# Altium PCB mach sac.PcbDoc
Units mm, origin at the board's own origin, x right, y up, seen from the top; angles counter-clockwise.
Board outline 69.72 x 37.72 mm, 2 copper layers (Top Layer, Bottom Layer); 82 components, 47 nets, 227 pads, 74 vias.
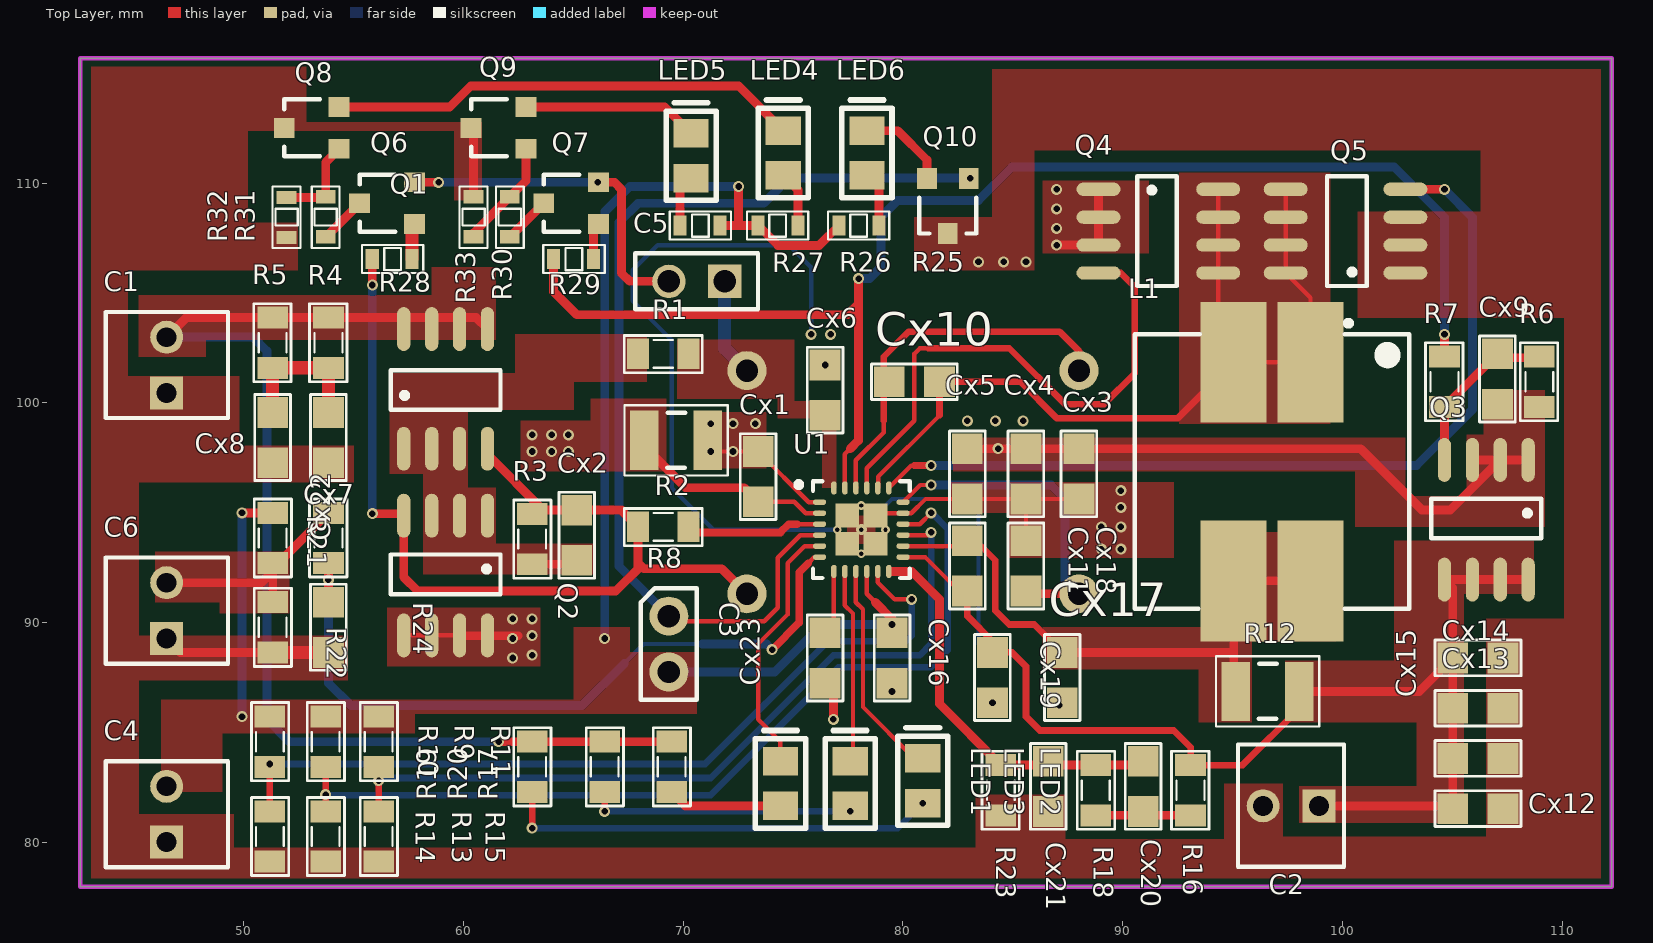
[diagram p0: Top Layer view]
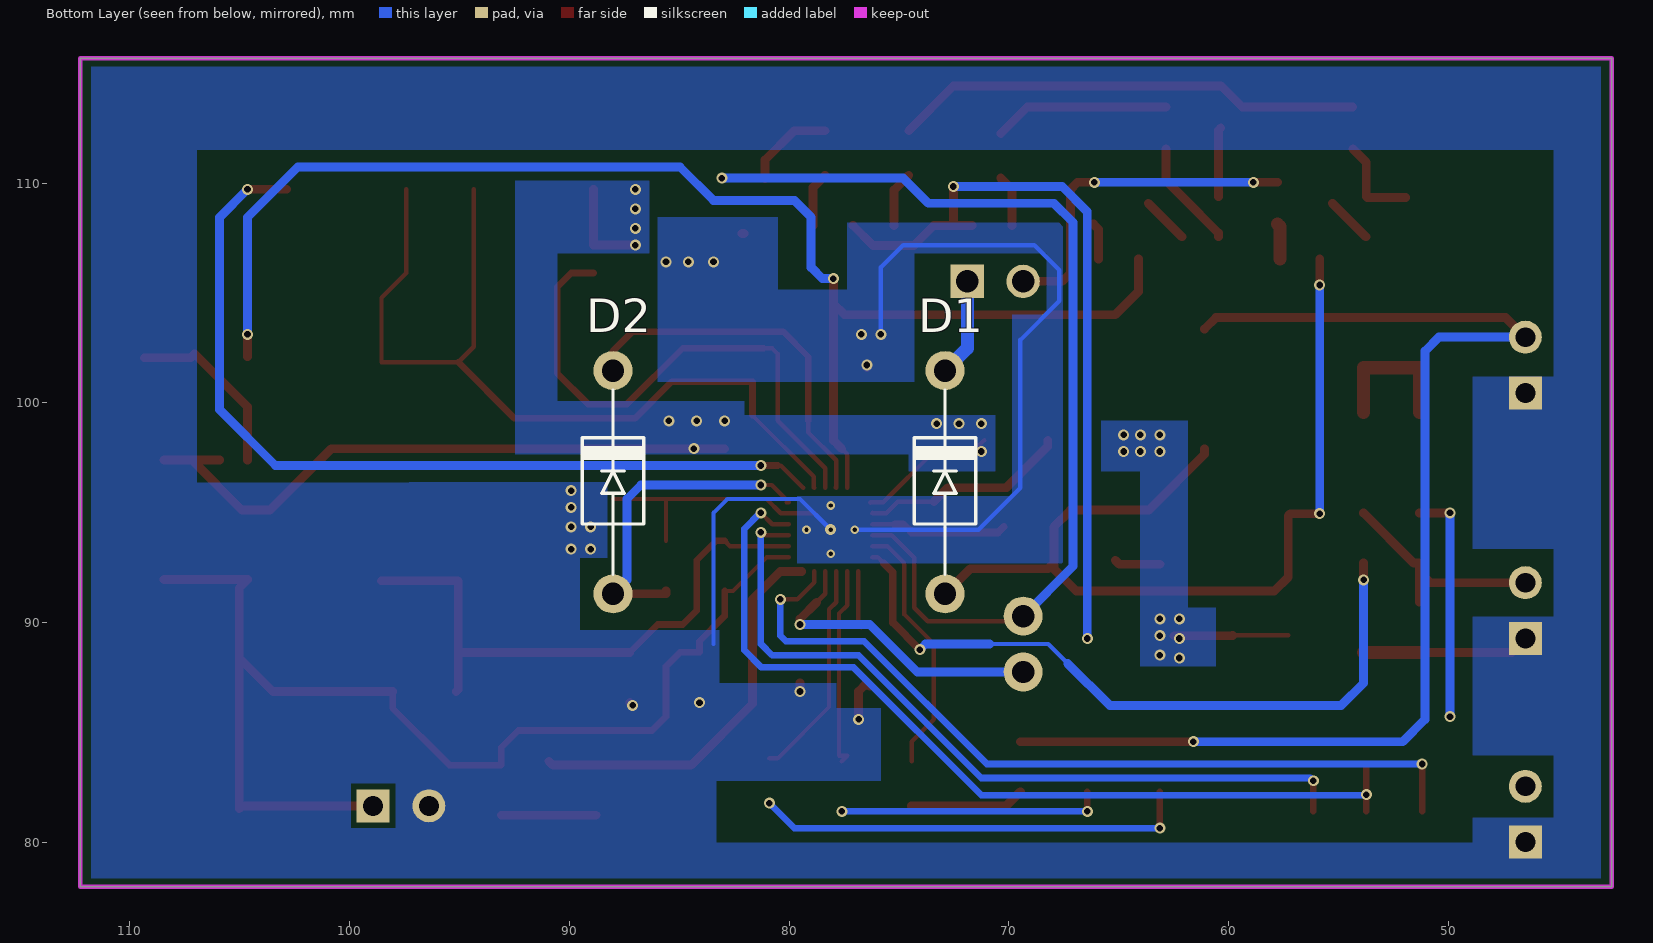
[diagram p1: Bottom Layer view, seen from below]
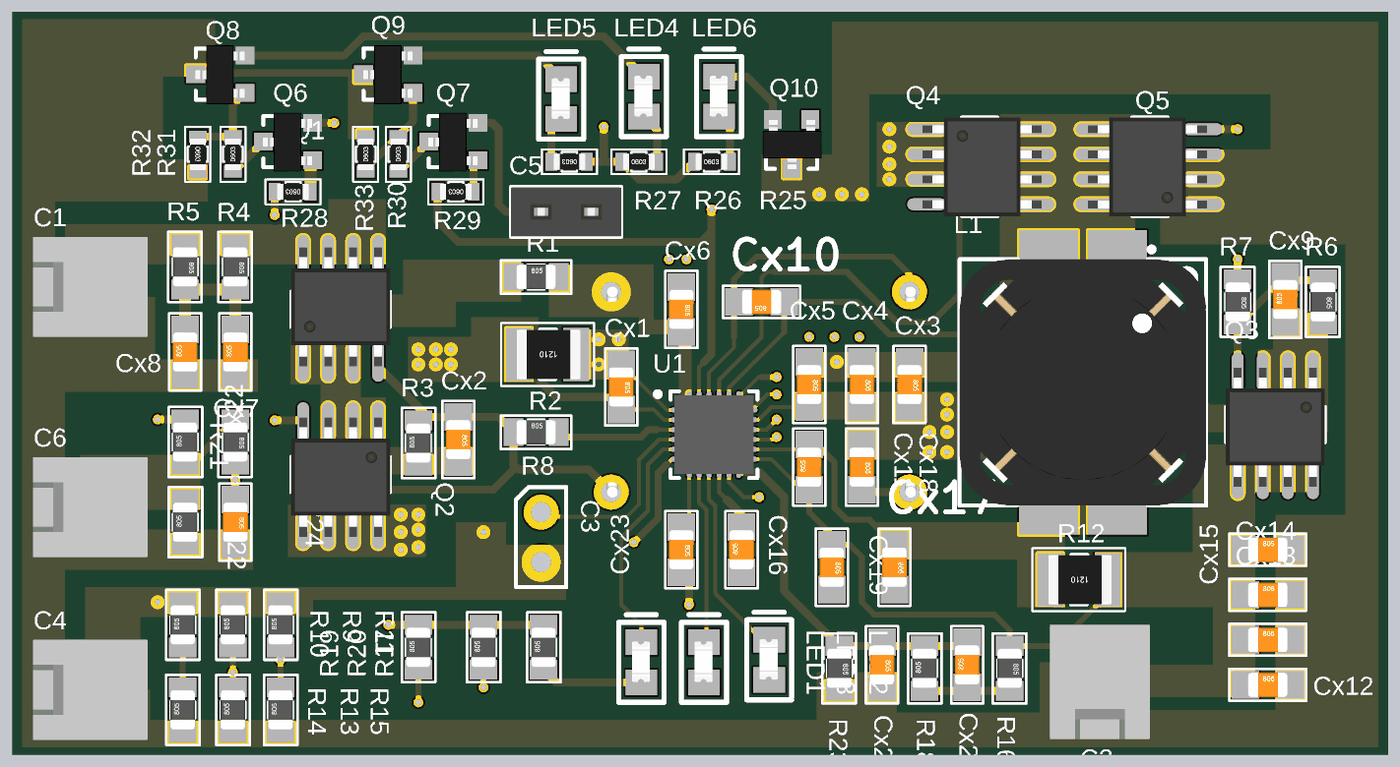
[diagram p2: 3D render of the assembled board from above, using the file's embedded part models]

## Layer stack, top to bottom
Top Solder: solder mask 0.0102, Solder Resist, Dk 3.5
Top Layer: signal copper 0.0356
Dielectric 1: dielectric 0.32, FR-4, Dk 4.8
Bottom Layer: signal copper 0.0356
Bottom Solder: solder mask 0.0102, Solder Resist, Dk 3.5

## Board outline
42.545,77.978 42.545,115.697 112.268,115.697 112.268,77.978

## Design rules (kind name [scope] priority, off if disabled: settings)
Clearance [All] p1: gap=0.254 ignorepadtopadclearanceinfootprint=FALSE except(0: Arc-Hole Track-Hole SMDPad-Hole THPad-Hole Via-Hole Fill-Hole Poly-Hole Region-Hole Text-Hole)
PlaneConnect [All] p1: planeconnectstyle=Direct reliefexpansion=0.508 reliefentries=4 reliefconductorwidth=0.254 reliefairgap=0.254
PolygonConnect [All] p1: connectstyle=Direct reliefconductorwidth=0.254 reliefentries=4 polygonreliefangle="90 Angle" airgapwidth=0.254
RoomDefinition "mach sac" [InComponentClass('mach sac')] p1: confinementstyle=ConfineIn formatcopy=TRUE lockcomponents=FALSE outline 0,0 50.8,0 50.8,25.4 0,25.4
RoutingVias [All] p1: holewidth=0.3 width=0.5 viastyle="Through Hole" minholewidth=0.3 minwidth=0.5 maxholewidth=0.3 maxwidth=0.5
SolderMaskExpansion [All] p1: expansion=0.102
Width [All] p1: maxlimit=0.6 minlimit=0.2 preferedwidth=0.4
29 further rules are at their usual default settings.

## Components (designator, comment, footprint, x,y, rotation, side; value= is the part's Value field where it differs from the comment)
C1 "Header2" HDR2 46.482,100.457 r90 top
C2 "Header2" HDR2 98.933,81.661 r180 top
C3 "JP2" JP2-CLOSED 69.342,90.297 r0 top
C4 "Header2" HDR2 46.482,80.01 r90 top
C5 "JP2" JP2-C1T 71.882,105.537 r180 top
C6 "Header2" HDR2 46.482,89.281 r90 top
Cx1 "0.1uF" C0805 73.406,96.774 r270 top value=33pF
Cx2 "2.2uF" C0805 65.151,94.107 r270 top value=33pF
Cx3 "10uF/50V" C0805 88.011,96.901 r270 top value=33pF
Cx4 "10uF/50V" C0805 85.598,96.901 r270 top value=33pF
Cx5 "10uF/50V" C0805 82.931,96.901 r270 top value=33pF
Cx6 "1uF" C0805 76.454,100.711 r270 top value=33pF
Cx7 "2.2uF" C0805 53.848,98.298 r90 top value=33pF
Cx8 "2.2uF" C0805 51.308,98.298 r90 top value=33pF
Cx9 "0.1uF" C0805 107.061,100.965 r90 top value=33pF
Cx10 "1uF" C0805 80.645,100.965 r180 top value=33pF
Cx11 "1uF" C0805 85.598,92.71 r270 top value=33pF
Cx12 "10uF" C0805 106.045,81.534 r0 top value=33pF
Cx13 "10uF" C0805 106.045,83.82 r0 top value=33pF
Cx14 "10uF" C0805 106.045,86.106 r0 top value=33pF
Cx15 "10uF" C0805 106.045,88.392 r0 top value=33pF
Cx16 "1uF" C0805 79.502,88.265 r90 top value=33pF
Cx17 "0.1uF" C0805 87.249,87.63 r270 top value=33pF
Cx18 "1uF" C0805 82.931,92.456 r90 top value=33pF
Cx19 "0.1uF" C0805 84.074,87.63 r270 top value=33pF
Cx20 "22p" C0805 90.932,82.423 r90 top value=33pF
Cx21 "22p" C0805 86.614,82.677 r270 top value=33pF
Cx22 "0.1uF" C0805 53.848,89.916 r270 top value=33pF
Cx23 "0.1uF" C0805 76.454,88.519 r270 top value=33pF
D1 "Diode" DIO-1A 72.898,91.313 r90 bottom value=1N5007
D2 "Diode" DIO-1A 88.011,91.313 r90 bottom value=1N5007
L1 "L-DIP-1" ? 96.802,96.879 r0 top value="150 mH"
LED1 "LED 3mm" "LED SMD" 74.422,81.661 r90 top value="LED 3 ly Single Colour"
LED2 "LED 3mm" "LED SMD" 80.899,81.788 r90 top value="LED 3 ly Single Colour"
LED3 "LED 3mm" "LED SMD" 77.597,81.661 r90 top value="LED 3 ly Single Colour"
LED4 "LED 3mm" "LED SMD" 74.549,110.363 r90 top value="LED 3 ly Single Colour"
LED5 "LED 3mm" "LED SMD" 70.358,110.236 r90 top value="LED 3 ly Single Colour"
LED6 "LED 3mm" "LED SMD" 78.359,110.363 r90 top value="LED 3 ly Single Colour"
Q1 "IRF9540" SO-8 59.182,100.584 r90 top
Q2 "IRF9540" SO-8 59.182,92.202 r270 top
Q3 "IRF9540" SO-8 106.553,94.742 r270 top value=IRF840
Q4 "IRF9540" SO-8 91.567,107.823 r0 top value=IRF840
Q5 "IRF9540" SO-8 100.203,107.823 r180 top value=IRF840
Q6 "TP0610K" SOT23-132 56.515,109.093 r90 top value=IRF840
Q7 "TP0610K" SOT23-132 64.897,109.093 r90 top value=IRF840
Q8 "2N7002DICT" SOT23-132 53.086,112.522 r90 top value=IRF840
Q9 "2N7002DICT" SOT23-132 61.594,112.522 r90 top value=IRF840
Q10 "2N7002DICT" SOT23-132 82.042,108.966 r180 top value=IRF840
R1 "10R" RES-SMD-0805 69.088,102.235 r0 top
R2 "0.01" RES-SMD-1210 69.723,98.298 r180 top
R3 "3.9" RES-SMD-0805 63.119,93.802 r90 top
R4 "3.9" RES-SMD-0805 53.848,102.743 r270 top
R5 "3.9" RES-SMD-0805 51.308,102.743 r270 top
R6 "10R" RES-SMD-0805 108.966,100.965 r270 top
R7 "10R" RES-SMD-0805 104.648,100.965 r270 top
R8 "1k" RES-SMD-0805 69.088,94.361 r0 top
R9 "1k" RES-SMD-0805 53.721,84.582 r90 top
R10 "100k" RES-SMD-0805 56.134,84.582 r90 top
R11 "1k" RES-SMD-0805 51.181,84.582 r90 top
R12 "0.01" RES-SMD-1210 96.647,86.868 r180 top
R13 "1k" RES-SMD-0805 53.721,80.264 r90 top
R14 "10k" RES-SMD-0805 56.134,80.264 r90 top
R15 "1k" RES-SMD-0805 51.181,80.264 r90 top
R16 "0R" RES-SMD-0805 93.091,82.372 r270 top
R17 "10k" RES-SMD-0805 69.469,83.439 r90 top
R18 "1000M" RES-SMD-0805 88.773,82.372 r90 top
R19 "10k" RES-SMD-0805 63.119,83.439 r90 top
R20 "10k" RES-SMD-0805 66.421,83.439 r90 top
R21 "100" RES-SMD-0805 51.308,93.853 r90 top
R22 "100" RES-SMD-0805 53.848,93.853 r270 top
R23 "10k" RES-SMD-0805 84.455,82.372 r270 top
R24 "100" RES-SMD-0805 51.308,89.789 r90 top
R25 "2.21k" RES-SMD-0603 77.978,108.077 r0 top
R26 "2.21k" RES-SMD-0603 74.295,108.077 r0 top
R27 "2.21k" RES-SMD-0603 70.777,108.077 r180 top
R28 "10k" RES-SMD-0603 56.769,106.553 r180 top
R29 "10k" RES-SMD-0603 65.024,106.553 r180 top
R30 "100k" RES-SMD-0603 62.103,108.458 r90 top
R31 "100k" RES-SMD-0603 53.721,108.458 r90 top
R32 "100k" RES-SMD-0603 51.943,108.458 r270 top
R33 "100k" RES-SMD-0603 60.452,108.458 r90 top
U1 "bq24610" QFN50P400X400X100_HS-25N 78.105,94.234 r0 top value=DIP24

## Footprints (in the part's own frame and the unit in brackets; to place one, negate y for a bottom-side part, rotate by r counter-clockwise, add the part's x,y. Pads: shape width x height; smd on the part's side, far side on the other; paste and mask are expansions set on the pad)
C0805 [mil] "Chip Resistor; Body 2.0 x 1.3 mm (LxW typ)"
  rect 55x55 smd: 1(-40,0) 2(50,0)
  silkscreen extent -72,-32 82,32, body extent -34,-25 44,25, height 31
DIO-1A [mil]
  round 70 hole 40: 1(0,0) 2(400,0)
  silkscreen extent 35,-55 365,55, body extent -11,-50 411,54, height 102
HDR2 [mm] "Connector; Header; 2 Position"
  rect 1.5x1.5 hole 0.9: 1(0,0)
  round 1.5 hole 0.9: 2(2.54,0)
  silkscreen extent -1.14,-2.79 3.68,2.77, body extent -1.27,-2.92 3.81,2.88, height 11.72
JP2-C1T [mm] "2 row, straight, gold plating"
  rect 1.52x1.52 hole 1.02: 1(0,0)
  round 1.52 hole 1.02: 2(2.54,0)
  silkscreen extent -1.52,-1.27 4.06,1.27, body extent -1.52,-1.25 4.06,1.25, height 8.51
JP2-CLOSED [mil]
  round 70 hole 40: 1(0,0) 2(0,-100)
  silkscreen extent -50,-150 50,50, body extent -50,-152 50,50, height 300
"LED SMD" [mm]
  rect 1.3x1.6 smd: 1(0,0) 2(2.032,0)
  silkscreen extent -1.02,-1.14 3.43,1.14, body extent 0.01,-0.43 2.07,0.47, height 0.85
QFN50P400X400X100_HS-25N [mm] "QFN, 24-Leads, Body 4.00x4.00mm, Pitch 0.50mm, Thermal Pad 2.90x2.90mm, IPC Medium Density"
  oval 0.6x0.25 smd: 1(-1.9,1.25) 2(-1.9,0.75) 3(-1.9,0.25) 4(-1.9,-0.25) 5(-1.9,-0.75) 6(-1.9,-1.25) 13(1.9,-1.25) 14(1.9,-0.75) 15(1.9,-0.25) 16(1.9,0.25) 17(1.9,0.75) 18(1.9,1.25)
  oval 0.25x0.6 smd: 7(-1.25,-1.9) 8(-0.75,-1.9) 9(-0.25,-1.9) 10(0.25,-1.9) 11(0.75,-1.9) 12(1.25,-1.9) 19(1.25,1.9) 20(0.75,1.9) 21(0.25,1.9) 22(-0.25,1.9) 23(-0.75,1.9) 24(-1.25,1.9)
  rect 1.08x1.08 smd: 17(-0.64,-0.64) 17(-0.64,0.64) 17(0.64,-0.64) 17(0.64,0.64)
  silkscreen extent -2.97,-2.2 2.2,2.2, body extent -2,-2 2,2, height 1
RES-SMD-0603 [mm]
  rect 0.6x0.9 smd: 1(-0.889,0) 2(0.927,0)
  silkscreen extent -1.4,-0.64 1.4,0.64, body extent -0.8,-0.4 0.8,0.4, height 0.43
RES-SMD-0805 [mil]
  rect 39.37x55 smd: 1(-45,0) 2(45,0)
  silkscreen extent -70,-34 70,33, body extent -39,-25 39,25, height 31
RES-SMD-1210 [mm] "Chip Capacitor, Body 3.2x2.5mm, IPC Medium Density"
  rect 1.3x2.7 smd: 1(-1.397,0) 2(1.503,0)
  silkscreen extent -2.3,-1.6 2.4,1.6, body extent -1.6,-1.25 1.6,1.25, height 0.6
SO-8 [mm] "8-Pin Small Outline Integrated Circuit 1.27 mm Pitch, IPC Medium Density"
  oval 2x0.6 smd: 1(-2.667,1.905) 2(-2.667,0.635) 3(-2.667,-0.635) 4(-2.667,-1.905) 5(2.781,-1.905) 6(2.781,-0.635) 7(2.781,0.635) 8(2.781,1.905)
  silkscreen extent -0.9,-2.5 0.9,2.5, body extent -2.89,-2.51 3.15,2.51, height 1.6
SOT23-132 [mm]
  rect 0.9x0.95 smd: 1(-0.95,-1.25) 3(0,1.25)
  rect 0.9x0.95 smd mask+0: 2(0.95,-1.25)
  silkscreen extent -1.3,-0.38 1.3,1.25, body extent -1.52,-1.23 1.48,1.27, height 1.06
? [mm] "SMD Inductor, 4-Leads, Body 12.5x12.5mm (max)"
  rect 3x5.5 smd: 1(-1.75,4.975) 1(1.75,4.975) 2(-1.75,-4.975) 2(1.75,-4.975)
  silkscreen extent -6.25,-6.25 6.25,6.88, body extent -6.25,-6.25 6.25,6.25, height 8.6

## Part data
C1 C2 C4 C6: "Header IDC, 2 x 1 Pin Vertical 2.54mm Pitch (Non-Boxed, Male)", Manufacturer="Würth Elektronik eiSos GmbH", partNo=613002143121, ComponentLink1 Description=Manufacturer, ComponentLink1URL=http://www.we-online.com, ComponentLink2 Description=Datasheet, ComponentLink2URL=http://katalog.we-online.de/em/datasheet/6130xx143121.pdf, Created by="Karrer Zheng", Created Date="29 March 2013", NoPins=02
C3 C5: "WR-PHD 2.54 mm Angled Socket Header", Manufacturer="Würth Elektronik eiSos GmbH", partNo=613002143121, ComponentLink1 Description=Manufacturer, ComponentLink1URL=http://www.we-online.com, ComponentLink2 Description=Datasheet, ComponentLink2URL=http://katalog.we-online.de/em/datasheet/6130xx143121.pdf, Created by="Karrer Zheng", Created Date="29 March 2013", NoPins=02
Cx1 Cx2 Cx3 Cx4 Cx5 Cx6 Cx7 Cx8 Cx9 Cx10 Cx11 Cx12 Cx13 Cx14 Cx15 Cx16 Cx17 Cx18 Cx19 Cx20 Cx21 Cx22 Cx23: library part CN
D1 D2: "Default Diode", Code - JEDEC=DO-214-AB, Published=8-Jun-2000, Publisher="Altium Limited", Revision="July-2002: Re-released for DXP Platform."
L1: "Inductor"
LED1 LED2 LED3 LED4 LED5 LED6: "LED Single colour Green and Red"
Q1 Q4 Q5: "HEXFET P-Channel Power MOSFET"
  Q1: ComponentLink1Description="Manufacturer Link", ComponentLink1URL=http://www.irf.com/, ComponentLink2Description=Datasheet, ComponentLink2URL=http://www.irf.com/product-info/datasheets/data/irf9540.pdf, DatasheetVersion=PD-9.421C, LatestRevisionDate=17-Jul-2002, LatestRevisionNote="Re-released for DXP Platform.", Note="Pin 2 is electrically connected to pin 4.", PackageDescription="TO, Thru-Hole, Vertical, Heatsink Mounted; 3 In-Line Leads; Pitch 2.54 mm", PackageReference=TO-220AB, PackageVersion=Feb-1997, Published=8-Jun-2000, Publisher="Altium Limited"
Q2: library part IRF840, "HEXFET P-Channel Power MOSFET", ComponentLink1Description="Manufacturer Link", ComponentLink1URL=http://www.irf.com/, ComponentLink2Description=Datasheet, ComponentLink2URL=http://www.irf.com/product-info/datasheets/data/irf9540.pdf, DatasheetVersion=PD-9.421C, LatestRevisionDate=17-Jul-2002, LatestRevisionNote="Re-released for DXP Platform.", Note="Pin 2 is electrically connected to pin 4.", PackageDescription="TO, Thru-Hole, Vertical, Heatsink Mounted; 3 In-Line Leads; Pitch 2.54 mm", PackageReference=TO-220AB, PackageVersion=Feb-1997, Published=8-Jun-2000, Publisher="Altium Limited"
Q3 Q6 Q7 Q8 Q9 Q10: library part IRF840, "MOSFET N - CHANNEL 500V - 0.75 - 8A - TO-220"
R1 R2 R3 R4 R5 R6 R7 R8 R9 R10 R11 R12 R13 R14 R15 R16 R17 R18 R19 R20 R21 R22 R23 R24 R25 R26 R27 R28 R29 R30 R31 R32 R33: library part Res-SMD, "Resistor", Manufacturer="Generic Components", Class=Passive, Published=08/06/2000, Publisher="Altium Hobart Technology Centre"
U1: library part BQ24610, "DIP24"

## Via types
v1: diameter 0.5, hole 0.3, Top Layer to Bottom Layer, 69 vias
v2: diameter 0.4, hole 0.2, Top Layer to Bottom Layer, 4 vias
v3: diameter 0.5, hole 0.2, Top Layer to Bottom Layer, 1 vias

## Nets (pads, with @x,y where several pads share a name; then routed paths per layer and width w, separated by ;. In a path a pad name is that pad's centre, name@x,y a point inside that pad or via, vN(x,y) a via of type N, cw(c..) or ccw(c..) an arc to the next point about the centre after c; other vN are vias at no path point)
ACDRV: Cx2.1 D1.1 Q1.4 Q2.4 R3.2 R8.1 R28.2 | length 43.1
  Top Layer w0.4: v1(55.842,94.958) 57.188,94.958 Q2.4 57.277,92.075 57.912,91.44 66.929,91.44 67.945,92.456 67.945,92.71 ; v1(55.842,105.372) R28.2 ; Q1.4 61.087,97.663 63.627,95.123 Cx2.1 67.183,95.123 R8.1 67.945,92.71 ; D1.1 71.755,92.456 68.199,92.456 67.945,92.71
  Bottom Layer w0.4: v1(55.842,94.958) v1(55.842,105.372)
ACP: Cx1.2 Q2.5 Q2.6 Q2.7 Q2.8 R2.2 U1.2 | length 14.8
  Top Layer w0.2: Q2.5 Q2.6 Q2.7 ; Cx1.2 75.05,95.504 75.57,94.984 U1.2 U1.2@76.184,95.005
  Top Layer w0.4: Q2.7 59.83,89.408 62.484,89.408 ; R2.2 68.22,98.023 70.104,96.139 72.771,96.139 Cx1.2
  other v1: 62.23,88.392 63.119,88.519 62.23,89.281 63.119,89.408 62.23,90.17 63.119,90.17 63.119,97.79 64.008,97.79 64.77,97.79 63.119,98.552 64.008,98.552 64.77,98.552
BATDRV: R7.1 R29.2 U1.23 | length 63.2
  Top Layer w0.2: U1.23 77.355,97.675 77.597,97.917
  Top Layer w0.4: R29.2 64.097,105.067 65.151,104.013 77.47,104.013 77.978,104.521 ; 77.597,97.917 77.978,98.298 77.978,104.521 ; v1(77.978,105.664) 77.978,104.521 ; R7.1 v1(104.648,103.124)
  Bottom Layer w0.4: v1(77.978,105.664) 78.486,105.664 78.994,106.172 78.994,108.458 79.756,109.22 83.439,109.22 84.963,110.744 102.362,110.744 104.648,108.458 v1(104.648,103.124)
CHGEN: C3.1 Q10.1 U1.4 | length 45.7
  Top Layer w0.2: C3.1 69.342,90.07 73.687,90.07 74.295,90.678 74.295,92.957 75.322,93.984 U1.4
  Bottom Layer w0.4: C3.1 67.075,92.564 67.075,108.223 67.945,109.093 73.66,109.093 74.803,110.236 v1(83.058,110.236)
D4: Cx10.1 L1.1 Q4.5 Q4.6 Q4.7 Q4.8 Q5.5 Q5.6 Q5.7 Q5.8 U1.20 | length 41.1
  Top Layer w0.2: U1.20 78.876,96.155 78.876,96.648 81.661,99.433 ; Q4.8 Q4.7 Q4.6 Q4.5 94.348,102.558 95.052,101.854 98.552,101.854 98.552,104.788 Q5.8 Q5.7 Q5.6 Q5.5
  Top Layer w0.3: 81.661,99.433 Cx10.1 85.344,100.965 86.995,99.314 92.512,99.314 L1.1@95.052,101.854
G3: Cx9.2 Q3.4 R6.1 R7.2 | length 8.2
  Top Layer w0.4: Q3.4 R7.2 Cx9.2 107.239,102.057 R6.1@109.347,102.057
G4: Q4.4 U1.21 | length 24.6
  Top Layer w0.2: U1.21 78.355,97.024 80.518,99.187 80.518,102.235 80.772,102.489 81.153,102.489
  Top Layer w0.3: 81.153,102.489 84.836,102.489 87.376,99.949 89.154,99.949 90.551,101.346 90.551,105.283 89.916,105.918 Q4.4
GND: C1.1 C2.2 C4.1 C6.1 Cx3.2 Cx4.2 Cx5.2 Cx6.1 Cx7.1 Cx8.1 Cx11.1 Cx12.2 Cx13.2 Cx14.2 Cx15.2 Cx16.1 Cx17.2 Cx19.2 Cx21.2 Cx22.2 Cx23.2 Q5.1 Q5.2 Q5.3 Q8.3 Q9.3 Q10.3 R13.1 R14.1 R15.1 R23.2 R24.1 R32.2 R33.2 U1.17 | length 68.3
  Top Layer w0.2: U1.17@78.745,94.874 78.855,94.984 80.005,94.984 80.379,94.984 81.026,95.631 Cx5.2 Cx4.2 ; Cx11.1 Cx4.2 ; Cx3.2 Cx4.2
  Top Layer w0.4: C6.1 47.117,88.646 R24.1 ; Q9.3 60.452,112.414 R33.2 ; Cx23.2@76.327,87.122 Cx23.2 76.835,86.868 v1(76.835,85.598) ; Cx6.1@76.454,101.6 v1(76.454,101.727) ; v1(79.502,86.868) Cx16.1 ; Q10.3 Q10.3@82.149,107.716 ; v1(87.122,86.233) Cx17.2
  Top Layer w0.6: R24.1 Cx22.2
  Bottom Layer w0.2: v1(75.819,103.124) 75.819,106.172 74.803,107.188 68.834,107.188 67.691,106.045 67.691,104.648 69.469,102.87 69.469,96.139 71.374,94.234 v2(77.005,94.234) ; v3(78.105,94.234) 79.502,95.631 82.804,95.631 83.439,94.996 83.439,89.027
  other v1: 84.074,86.36 89.027,93.345 89.916,93.345 89.027,94.361 89.916,94.361 89.916,95.25 89.916,96.012 76.708,103.124 83.439,106.426 84.582,106.426 85.598,106.426
  other v2: 78.105,93.134 79.205,94.234 78.105,95.334
IN+: C1.2 Q1.5 Q1.6 Q1.7 Q1.8 R4.1 R5.1 R17.2 R19.2 R20.2 | length 55.6
  Top Layer w0.4: C1.2 47.371,103.886 R5.1 R4.1 60.566,103.886 Q1.5 ; v1(61.595,84.582) R19.2 R20.2 R17.2
  Bottom Layer w0.4: C1.2 50.419,102.997 51.054,102.362 51.054,85.598 52.07,84.582 v1(61.595,84.582)
NetC2_1: C2.1 Cx12.1 Cx13.1 Cx14.1 Cx15.1 Cx18.1 Cx19.1 Q3.5 Q3.6 Q3.7 Q3.8 R12.1 R16.1 U1.13 | length 54.7
  Top Layer w0.2: U1.13 81.006,92.984 82.55,91.44 Cx18.1
  Top Layer w0.3: Cx18.1 82.931,90.297 84.074,89.154 Cx19.1 84.963,88.646 85.598,88.011 85.598,85.725 86.233,85.09 92.329,85.09 93.091,84.328 R16.1 95.453,83.515 98.044,86.106 R12.1
  Top Layer w0.4: R12.1 103.505,86.868 Cx15.1 ; C2.1 104.902,81.661 Cx12.1 Cx13.1 Cx14.1 Cx15.1 ; Q3.8 Q3.7 Q3.6 Q3.5 105.029,91.58 Cx15.1
NetC5_2: C5.2 Q6.2 Q7.2 | length 16.1
  Top Layer w0.4: Q6.2 v1(58.862,110.043) ; Q7.2 66.868,110.043 67.183,109.728 67.183,105.918 67.564,105.537 C5.2 C5.2@69.342,106.045
  Bottom Layer w0.4: v1(58.862,110.043) v1(66.101,110.043)
NetCx7_2: Cx7.2 Cx8.2 R4.2 R5.2 | length 6.6
  Top Layer w0.6: Cx8.2 R5.2 R4.2 Cx7.2
NetCx10_2: Cx10.2 D2.2 U1.22 | length 17.1
  Top Layer w0.2: U1.22@77.876,96.155 U1.22 77.855,97.392 79.121,98.658 79.121,99.187
  Top Layer w0.3: 79.121,99.187 79.121,102.108 80.264,103.251 87.122,103.251 88.011,102.362 D2.2
NetCx11_2: Cx11.2 D2.1 U1.18 | length 15.2
  Top Layer w0.2: U1.18@80.117,95.484 U1.18 80.787,96.266 v1(81.28,96.266)
  Top Layer w0.4: Cx11.2 85.598,91.313 D2.1
  Bottom Layer w0.4: v1(81.28,96.266) 86.741,96.266 87.376,95.631 87.376,91.948 D2.1
NetCx17_1: Cx17.1 Cx18.2 L1.2 R12.2 U1.14 | length 27.2
  Top Layer w0.2: U1.14 82.689,93.484 Cx18.2
  Top Layer w0.3: Cx18.2 83.312,93.726 84.201,92.837 84.201,90.551 84.836,89.916 85.979,89.916 Cx17.1
  Top Layer w0.4: Cx17.1 95.052,88.646 ; R12.2 95.052,86.96 95.052,88.646 ; L1.2@98.552,91.904 95.052,91.904 95.052,88.646
NetCx20_1: Cx20.1 R16.2 R18.1 | length 4.3
  Top Layer w0.4: R18.1 R16.2
NetCx20_2: Cx20.2 Cx21.1 R18.2 R23.1 U1.12 | length 18
  Top Layer w0.4: U1.12@79.434,92.334 80.386,92.334 81.661,91.059 81.661,86.309 R23.1 R18.2 90.754,83.515 Cx20.2
NetCx22_1: Cx22.1 R22.2 U1.6 | length 33.6
  Top Layer w0.2: 75.692,92.71 75.966,92.984 U1.6
  Top Layer w0.35: v1(74.041,88.773) 75.278,90.01 75.278,92.296 75.692,92.71
  Top Layer w0.4: Cx22.1 v1(53.848,91.948) R22.2
  Bottom Layer w0.2: 67.31,88.138 68.199,89.027 70.866,89.027
  Bottom Layer w0.4: v1(53.848,91.948) 53.848,87.249 54.864,86.233 65.405,86.233 67.31,88.138 ; 70.866,89.027 73.787,89.027 v1(74.041,88.773)
NetCx23_1: Cx23.1 U1.7 | length 2.6
  Top Layer w0.2: Cx23.1@76.708,89.789 76.855,89.936 U1.7
NetLED1_1: LED1.1 R17.1 | length 5.2
  Top Layer w0.4: R17.1 70.104,81.661 LED1.1
NetLED1_2: LED1.2 U1.5 | length 11.8
  Top Layer w0.2: LED1.2 74.422,84.582 73.406,85.598 73.406,89.027 74.749,90.37 74.749,92.71 75.523,93.484 U1.5
NetLED2_1: LED2.1 R19.1 | length 19.9
  Top Layer w0.3: v1(63.119,80.645) R19.1
  Bottom Layer w0.3: v1(63.119,80.645) 79.756,80.645 v1(80.899,81.788)
NetLED2_2: LED2.2 U1.9 | length 10
  Top Layer w0.2: U1.9 77.855,90.928 78.178,90.605 78.178,86.16 80.518,83.82 LED2.2
NetLED3_1: LED3.1 R20.1 | length 12.1
  Top Layer w0.3: v1(66.421,81.407) R20.1
  Bottom Layer w0.3: v1(66.421,81.407) v1(77.597,81.407)
NetLED3_2: LED3.2 U1.8 | length 9.3
  Top Layer w0.2: U1.8 77.355,90.786 77.724,90.417 77.724,83.935 77.355,83.935 LED3.2
NetLED4_1: LED4.1 R26.2 | length 2.6
  Top Layer w0.4: LED4.1 75.222,109.69 R26.2
NetLED4_2: LED4.2 Q8.2 | length 21.5
  Top Layer w0.4: Q8.2 59.37,113.472 60.325,114.427 72.517,114.427 LED4.2
NetLED5_1: LED5.1 R27.2 | length 2.4
  Top Layer w0.4: R27.2 69.85,109.728 LED5.1
NetLED5_2: LED5.2 Q9.2 | length 8
  Top Layer w0.4: Q9.2 69.154,113.472 LED5.2
NetLED6_1: LED6.1 R25.2 | length 2.5
  Top Layer w0.4: LED6.1 78.905,109.817 R25.2
NetLED6_2: LED6.2 Q10.2 | length 4.1
  Top Layer w0.4: LED6.2 79.756,112.395 81.092,111.059 Q10.2
NetQ5_1: Q5.4 U1.19 | length 40.4
  Top Layer w0.2: U1.19 80.376,97.155 80.518,97.155
  Top Layer w0.3: 80.518,97.155 v1(81.28,97.155)
  Top Layer w0.4: Q5.4 v1(104.648,109.728)
  Bottom Layer w0.4: v1(81.28,97.155) 103.378,97.155 105.918,99.695 105.918,108.458 v1(104.648,109.728)
NetQ6_1: Q6.1 R28.1 | length 1.6
  Top Layer w0.6: R28.1 57.658,108.036 Q6.1
NetQ6_3: Q6.3 R31.1 | length 2.2
  Top Layer w0.4: R31.1 53.741,107.569 Q6.3
NetQ7_1: Q7.1 R29.1 | length 1.7
  Top Layer w0.4: R29.1 65.913,107.909 Q7.1
NetQ7_3: Q7.3 R30.1 | length 2.2
  Top Layer w0.4: R30.1 62.123,107.569 Q7.3
NetQ8_1: Q8.1 R31.2 R32.1 | length 4.2
  Top Layer w0.2: R31.2@53.683,109.347 R31.2
  Top Layer w0.4: R32.1 R31.2@53.683,109.347 ; R31.2 53.721,110.957 Q8.1
NetQ9_1: Q9.1 R30.2 R33.1 | length 5
  Top Layer w0.4: R33.1 60.452,107.734 R30.2 62.844,110.126 Q9.1
NetR8_2: R8.2 U1.3 | length 6.2
  Top Layer w0.2: 75.188,94.484 U1.3
  Top Layer w0.35: R8.2 70.485,94.107 74.422,94.107 74.799,94.484 75.188,94.484
NetR9_1: R9.1 R13.2 U1.16 | length 41.2
  Top Layer w0.2: U1.16 80.768,94.484 v1(81.28,94.996)
  Top Layer w0.3: R13.2 v1(53.721,82.169) R9.1
  Bottom Layer w0.3: v1(53.721,82.169) 53.74,82.15 71.249,82.15 77.064,87.965 81.255,87.965 82.042,88.752 82.042,94.27 81.316,94.996 v1(81.28,94.996)
NetR10_1: R10.1 R14.2 U1.15 | length 35.7
  Top Layer w0.2: U1.15 81.157,93.984 v1(81.28,94.107) v1@81.28,93.98
  Top Layer w0.3: R14.2 v1(56.134,82.804)
  Bottom Layer w0.3: v1(56.134,82.804) 56.261,82.931 71.247,82.931 76.835,88.519 80.772,88.519 81.28,89.027 v1(81.28,94.107)
NetR11_1: R11.1 R15.2 U1.11 | length 37.7
  Top Layer w0.2: U1.11 78.855,91.833 79.629,91.059 v1(80.391,91.059)
  Top Layer w0.3: R15.2 R11.1
  Bottom Layer w0.3: v1(51.181,83.566) 70.993,83.566 76.581,89.154 80.137,89.154 80.391,89.408 v1(80.391,91.059)
NTC: C6.2 R21.1 R22.1 R24.2 | length 10.3
  Top Layer w0.4: C6.2 50.8,91.821 R21.1@51.308,92.329 ; R24.2 R21.1@51.308,92.329 ; R22.1 51.562,92.71 R21.1 R21.1@51.308,92.329
S: Cx2.2 Q1.1 Q1.2 Q1.3 Q2.1 Q2.2 Q2.3 R1.1 R3.1 | length 2.1
  Top Layer w0.4: R3.1 64.973,92.659 Cx2.2
S3: Cx1.1 Cx3.1 Cx4.1 Cx5.1 Cx9.1 Q3.1 Q3.2 Q3.3 Q4.1 Q4.2 Q4.3 R2.1 R6.2 U1.1 | length 39.7
  Top Layer w0.2: R2.1 71.628,97.79 v1(72.263,97.79) Cx1.1 75.712,95.484 U1.1 76.28,95.484 U1.1@76.301,95.463
  Top Layer w0.4: Cx5.1 Cx4.1 Cx3.1 100.838,97.917 103.632,95.123 104.902,95.123 Q3.2 ; v1(86.995,107.188) Q4.3 Q4.2 Q4.1 ; Q3.3 Q3.2 ; Q3.1 Q3.2
  other v1: 71.247,97.79 84.328,97.917 71.247,99.06 72.263,99.06 73.279,99.06 82.931,99.187 84.201,99.187 85.471,99.187 86.995,107.95 86.995,108.839 86.995,109.728
VCC: C5.1 Cx6.2 D1.2 R1.2 U1.24 | length 4.5
  Bottom Layer w0.6: C5.1 71.882,102.489 D1.2
VREF: C3.2 C4.2 Cx16.2 R9.2 R10.2 R11.2 R21.2 R25.1 R26.1 R27.1 U1.10 | length 59.2
  Top Layer w0.2: U1.10 78.355,91.317 78.74,90.932
  Top Layer w0.4: v1(49.911,94.996) R21.2 ; R27.1 72.536,108.077 ; v1(72.517,109.855) 72.517,108.096 72.536,108.077 ; R25.1 76.185,107.173 74.31,107.173 R26.1 72.536,108.077 ; 78.74,90.932 79.502,90.17 v1(79.502,89.916)
  Bottom Layer w0.4: v1(49.911,85.725) v1(49.911,94.996) ; v1(66.421,89.281) 66.421,108.712 67.564,109.855 v1(72.517,109.855) ; C3.2@68.707,87.757 C3.2 74.168,87.757 76.327,89.916 v1(79.502,89.916)

## Polygon pours and split planes (outlines as drawn)
GND on Top Layer "GND_L01_P148" (solid, remove dead copper, pour order 148): 60.833,109.22 60.833,112.776 52.832,112.776 52.832,115.316 43.053,115.316 43.053,100.457 44.704,100.457 44.704,106.045 52.451,106.045 52.451,108.204 50.165,108.204 50.165,112.395 59.563,112.395 59.563,109.22
GND on Top Layer "GND_L01_P116" (solid, remove dead copper, pour order 116): 111.76,115.189 84.074,115.189 84.074,108.458 80.518,108.458 80.518,106.045 85.979,106.045 85.979,111.506 106.299,111.506 106.299,108.712 100.711,108.712 100.711,103.886 110.109,103.886 110.109,89.535 111.76,89.535
VREF on Top Layer "VREF_L01_P164" (solid, remove dead copper, pour order 164): 65.024,86.487 65.024,89.789 67.564,89.789 67.564,88.646 70.612,88.646 70.612,85.852 57.785,85.852 57.785,84.963 49.022,84.963 49.022,82.296 46.228,82.296 46.228,86.487
S3 on Top Layer "S3_L01_P162" (solid, remove dead copper, pour order 162): 86.36,106.807 91.186,106.807 91.186,110.109 86.36,110.109
IN+ on Top Layer "IN+_L01_P094" (solid, remove dead copper, pour order 94): 61.468,106.172 58.547,106.172 58.547,104.902 45.212,104.902 45.212,102.108 48.26,102.108 48.26,102.87 61.468,102.87
GND on Top Layer "GND_L01_P158" (solid, remove dead copper, pour order 158): 54.737,89.408 43.815,89.408 43.815,87.376 54.737,87.376
GND on Top Layer "GND_L01_P152" (solid, remove dead copper, pour order 152): 59.563,109.22
GND on Top Layer "GND_L01_P150" (solid, remove dead copper, pour order 150): 60.579,109.093
GND on Top Layer "GND_L01_P146" (solid, remove dead copper, pour order 146): 54.737,112.522
GND on Top Layer "GND_L01_P144" (solid, remove dead copper, pour order 144): 60.96,113.03
NTC on Top Layer "NTC_L01_P142" (solid, remove dead copper, pour order 142): 45.974,93.218 52.07,93.218 52.07,90.424 48.895,90.424 48.895,90.932 45.974,90.932
S3 on Top Layer "S3_L01_P140" (solid, remove dead copper, pour order 140): 106.426,100.584 106.426,98.552 105.664,98.552 105.664,95.758 102.87,95.758 102.87,98.425 82.296,98.425 82.296,96.901 100.584,96.901 100.584,94.361 109.22,94.361 109.22,100.584
D4 on Top Layer "D4_L01_P138" (solid, remove dead copper, pour order 138): 92.583,110.49 92.583,99.06 99.441,99.06 99.441,110.49
NetC2_1 on Top Layer "NETC2_1_L01_P128" (solid, remove dead copper, pour order 128): 101.473,83.439
NetC2_1 on Top Layer "NETC2_1_L01_P126" (solid, remove dead copper, pour order 126): 99.06,82.931
NetC2_1 on Top Layer "NETC2_1_L01_P124" (solid, remove dead copper, pour order 124): 98.044,80.899 103.378,80.899 103.378,82.55 98.044,82.55
NetC2_1 on Top Layer "NETC2_1_L01_P122" (solid, remove dead copper, pour order 122): 97.409,88.265 102.362,88.265 102.362,93.726 108.712,93.726 108.712,91.313 105.537,91.313 105.537,80.899 103.378,80.899 103.378,85.471 97.409,85.471
NetCx17_1 on Top Layer "NETCX17_1_L01_P120" (solid, remove dead copper, pour order 120): 99.822,93.091
NetCx17_1 on Top Layer "NETCX17_1_L01_P118" (solid, remove dead copper, pour order 118): 93.599,94.107 93.599,89.789 86.36,89.789 86.36,87.884 93.472,87.884 93.472,85.471 95.885,85.471 95.885,89.154 99.695,89.154 99.695,94.107
GND on Top Layer "GND_L01_P114" (solid, remove dead copper, pour order 114): 49.784,101.219 49.784,98.044 54.991,98.044 54.991,96.393 45.212,96.393 45.212,81.28 49.53,81.28 49.53,79.756 83.312,79.756 83.312,82.169 87.376,82.169 87.376,80.137 94.615,80.137 94.615,82.677 97.282,82.677 97.282,80.264 106.553,80.264 106.553,90.17 111.76,90.17 111.76,78.359 43.053,78.359 43.053,101.219
GND on Top Layer "GND_L01_P112" (solid, remove dead copper, pour order 112): 82.169,96.393 92.329,96.393 92.329,92.964 84.836,92.964 84.836,94.996 82.169,94.996
VCC on Top Layer "VCC_L01_P110" (solid, remove dead copper, pour order 110): 69.723,102.87 75.057,102.87 75.057,100.076 76.962,100.076 76.962,96.139 76.327,96.139 76.327,99.314 74.295,99.314 74.295,100.203 69.723,100.203
VCC on Top Layer "VCC_L01_P108" (solid, remove dead copper, pour order 108): 69.723,103.251
S3 on Top Layer "S3_L01_P106" (solid, remove dead copper, pour order 106): 70.612,97.028 70.612,99.568 73.787,99.568 73.787,97.028
S on Top Layer "S_L01_P104" (solid, remove dead copper, pour order 104): 65.913,93.599 58.166,93.599 58.166,92.202 65.913,92.202
ACP on Top Layer "ACP_L01_P098" (solid, remove dead copper, pour order 98): 65.786,100.203 65.786,99.187 62.611,99.187 62.611,96.901 69.215,96.901 69.215,100.203
S on Top Layer "IN+_L01_P-001" (solid, remove dead copper, pour order 96): 68.326,103.124 62.357,103.124 62.357,101.346 56.642,101.346 56.642,96.774 58.166,96.774 58.166,93.345 61.468,93.345 61.468,96.139 60.198,96.139 60.198,99.695 65.024,99.695 65.024,100.965 68.326,100.965
IN+ on Top Layer "IN+_L01_P092" (solid, remove dead copper, pour order 92): 61.468,102.616
ACP on Top Layer "ACP_L01_P090" (solid, remove dead copper, pour order 90): 68.961,96.901
ACP on Top Layer "ACP_L01_P088" (solid, remove dead copper, pour order 88): 56.515,90.678 56.515,88.011 63.5,88.011 63.5,90.678
ACP on Top Layer "ACP_L01_P086" (solid, remove dead copper, pour order 86): 56.388,91.567
ACP on Top Layer "ACP_L01_P084" (solid, remove dead copper, pour order 84): 56.388,90.678
GND on Top Layer "GND_L01_P074" (solid, remove dead copper, pour order 74): 77.465,94.234
GND on Top Layer "GND_L01_P072" (solid, remove dead copper, pour order 72): 77.465,94.874 78.745,94.874 78.745,93.594 77.465,93.594
NetCx17_1 on Top Layer "NETCX17_1_L01_P038" (solid, remove dead copper, pour order 38): 115.697,106.807
NetCx17_1 on Top Layer "NETCX17_1_L01_P034" (solid, remove dead copper, pour order 34): 127.381,88.519
NetCx17_1 on Top Layer "NETCX17_1_L01_P032" (solid, remove dead copper, pour order 32): 124.714,89.789
GND on Bottom Layer "GND_L02_P172" (solid, remove dead copper, pour order 172): 97.282,96.393 106.934,96.393 106.934,111.506 45.212,111.506 45.212,101.219 48.895,101.219 48.895,93.345 45.212,93.345 45.212,90.297 48.895,90.297 48.895,83.947 45.212,83.947 45.212,81.153 48.895,81.153 48.895,80.01 97.282,80.01 97.282,78.359 43.053,78.359 43.053,115.316 111.76,115.316 111.76,78.359 97.282,78.359
GND on Bottom Layer "GND_L02_P182" (solid, remove dead copper, pour order 182): 77.47,95.758 69.85,95.758 69.85,104.013 68.263,104.013 68.263,106.807 74.295,106.807 74.295,100.965 77.343,100.965 77.343,108.204 67.437,108.204 67.437,92.71 76.835,92.71
GND on Bottom Layer "GND_L02_P186" (solid, remove dead copper, pour order 186): 75.946,93.853
GND on Bottom Layer "GND_L02_P184" (solid, remove dead copper, pour order 184): 76.2,92.71
GND on Bottom Layer "GND_L02_P180" (solid, remove dead copper, pour order 180): 97.155,76.073
GND on Bottom Layer "GND_L02_P178" (solid, remove dead copper, pour order 178): 95.758,76.708
GND on Bottom Layer "GND_L02_P176" (solid, remove dead copper, pour order 176): 96.647,76.581
GND on Bottom Layer "GND_L02_P174" (solid, remove dead copper, pour order 174): 96.647,76.581
IN+ on Bottom Layer "IN+_L02_P170" (solid, remove dead copper, pour order 170): 50.927,101.981
IN+ on Bottom Layer "IN+_L02_P168" (solid, remove dead copper, pour order 168): 52.324,102.108
IN+ on Bottom Layer "IN+_L02_P166" (solid, remove dead copper, pour order 166): 45.72,103.759
GND on Bottom Layer "GND_L02_P160" (solid, remove dead copper, pour order 160): 83.185,87.249 83.185,89.662 89.535,89.662 89.535,92.964 88.265,92.964 88.265,96.393 97.282,96.393 97.282,78.359 83.312,78.359 83.312,82.804 75.819,82.804 75.819,86.106 77.851,86.106 77.851,87.249
GND on Bottom Layer "GND_L02_P156" (solid, remove dead copper, pour order 156): 54.483,89.408
GND on Bottom Layer "GND_L02_P154" (solid, remove dead copper, pour order 154): 44.831,90.17
S3 on Bottom Layer "S3_L02_P136" (solid, remove dead copper, pour order 136): 82.677,107.569
S3 on Bottom Layer "S3_L02_P134" (solid, remove dead copper, pour order 134): 83.439,107.823
GND on Bottom Layer "GND_L02_P132" (solid, remove dead copper, pour order 132): 80.518,108.458 80.518,105.156 75.438,105.156 75.438,100.965 85.979,100.965 85.979,108.458
S3 on Bottom Layer "S3_L02_P130" (solid, remove dead copper, pour order 130): 70.612,99.441 82.042,99.441 82.042,100.076 90.551,100.076 90.551,106.807 86.36,106.807 86.36,110.109 92.456,110.109 92.456,97.663 74.549,97.663 74.549,96.901 70.612,96.901
ACP on Bottom Layer "ACP_L02_P102" (solid, remove dead copper, pour order 102): 61.722,88.011 61.595,88.011 64.008,88.011 64.008,96.901 65.786,96.901 65.786,99.187 61.849,99.187 61.849,90.678 60.579,90.678 60.579,88.011
ACP on Bottom Layer "ACP_L02_P100" (solid, remove dead copper, pour order 100): 62.611,99.06
GND on Bottom Layer "GND_L02_P062" (solid, remove dead copper, pour order 62): 79.629,95.758 79.629,92.71 76.581,92.71 76.581,95.758
GND on Bottom Layer "GND_L02_P060" (solid, remove dead copper, pour order 60): 76.835,95.504
D4 on Bottom Layer "D4_L02_P026" (solid, remove dead copper, pour order 26): 120.142,107.315
D4 on Bottom Layer "D4_L02_P022" (solid, remove dead copper, pour order 22): 101.346,89.662
S3 on Bottom Layer "S3_L02_P012" (solid, remove dead copper, pour order 12): 70.866,99.314

## Keep-outs
Keep-Out Layer:
  the board outline again, w0.2